# Altium PCB PCB1.PcbDoc
Units mil, origin at the board's own origin, x right, y up, seen from the top; angles counter-clockwise.
Board outline 2000 x 2000 mil, 2 copper layers (Top Layer, Bottom Layer); 59 components, 41 nets, 235 pads, 101 vias.
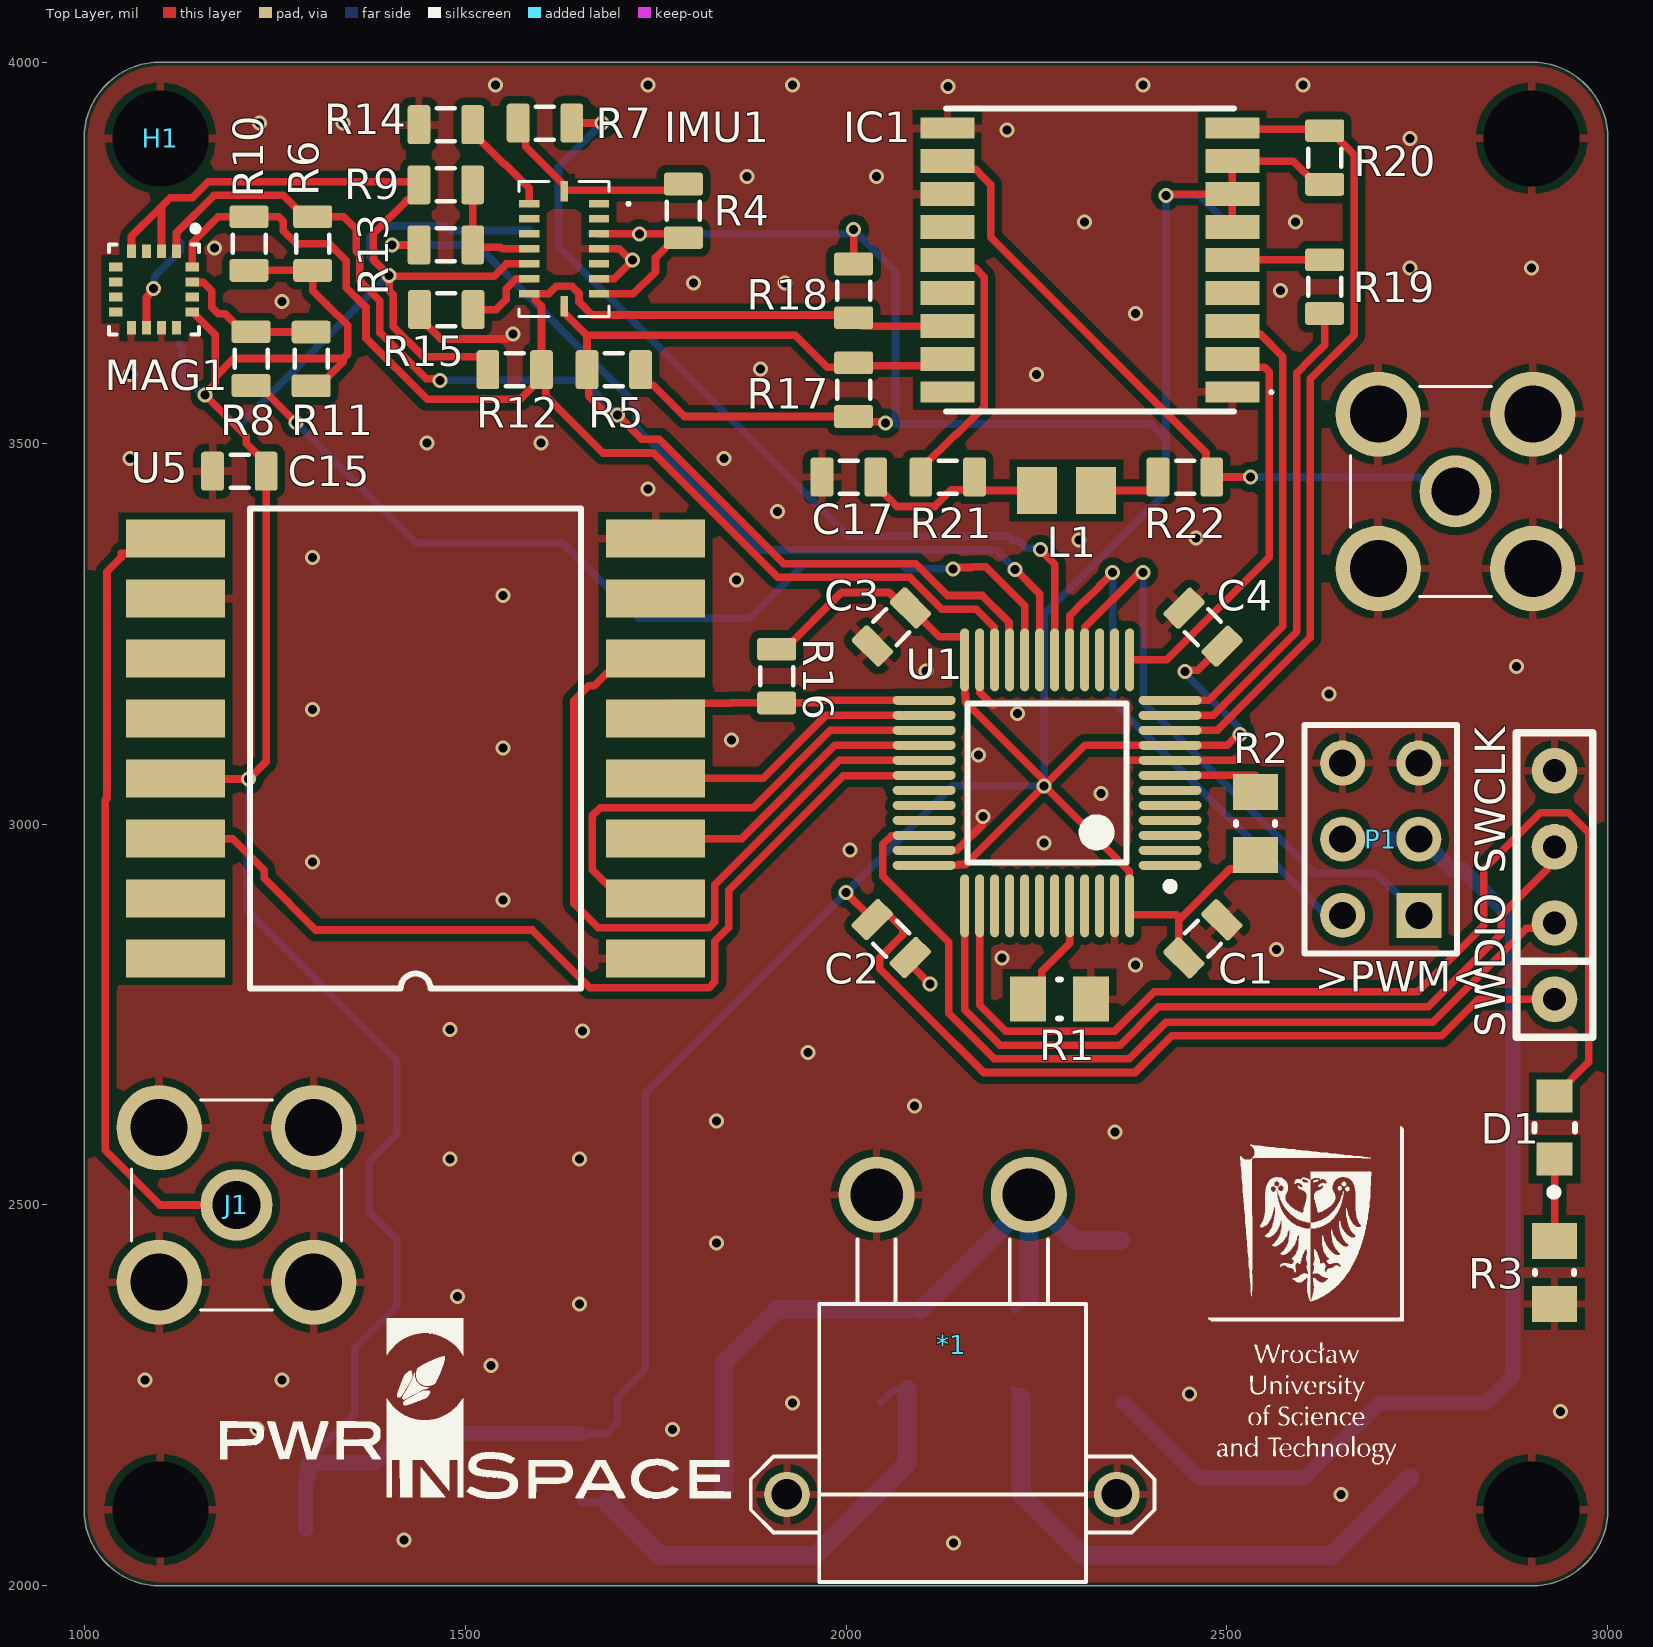
[diagram p0: Top Layer view]
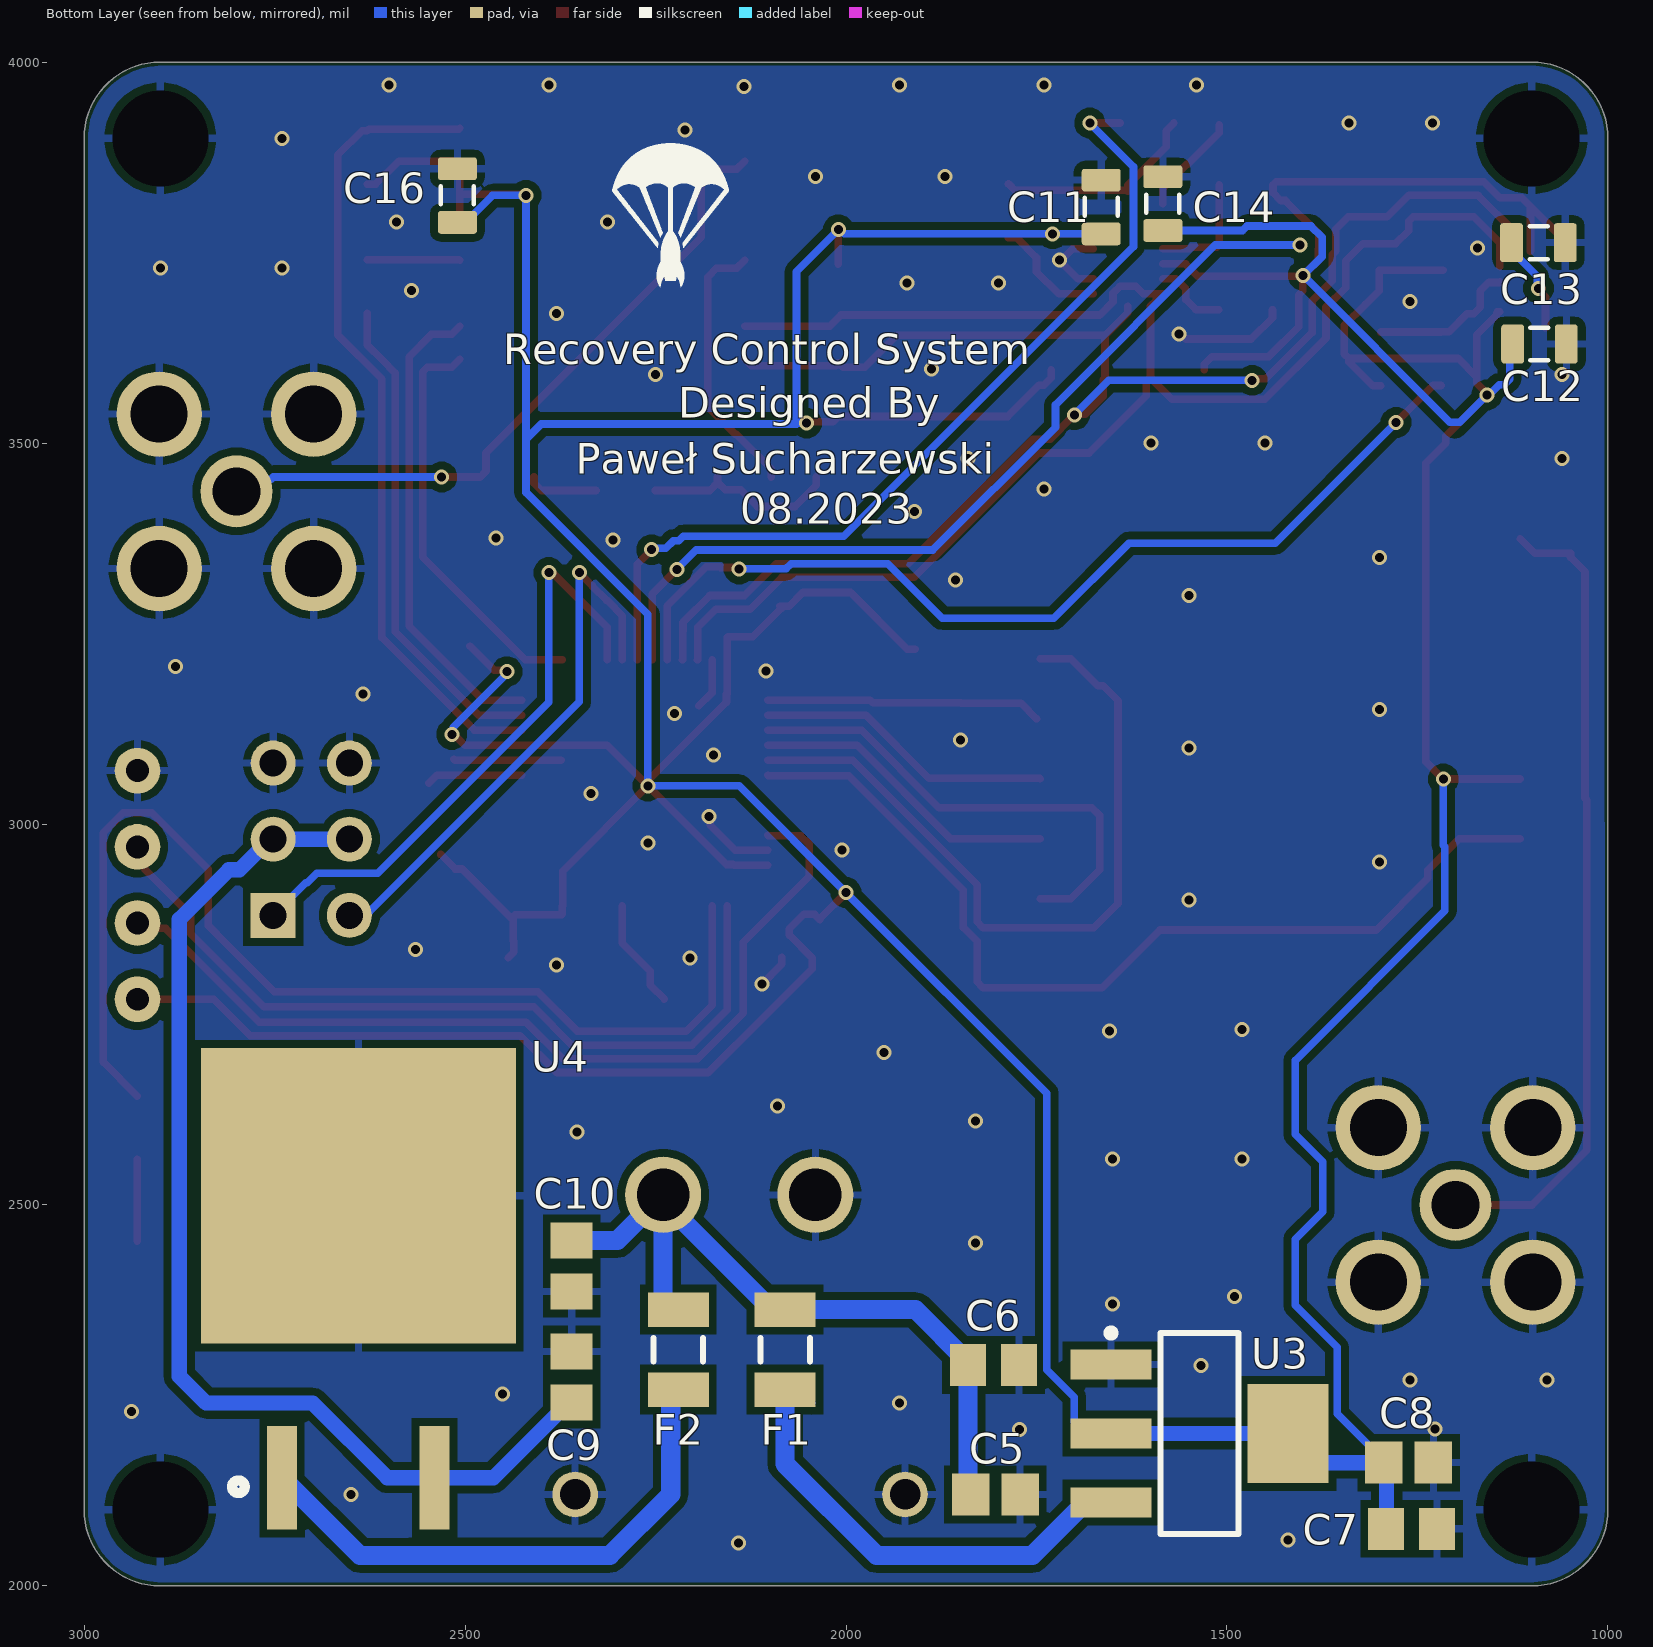
[diagram p1: Bottom Layer view, seen from below]
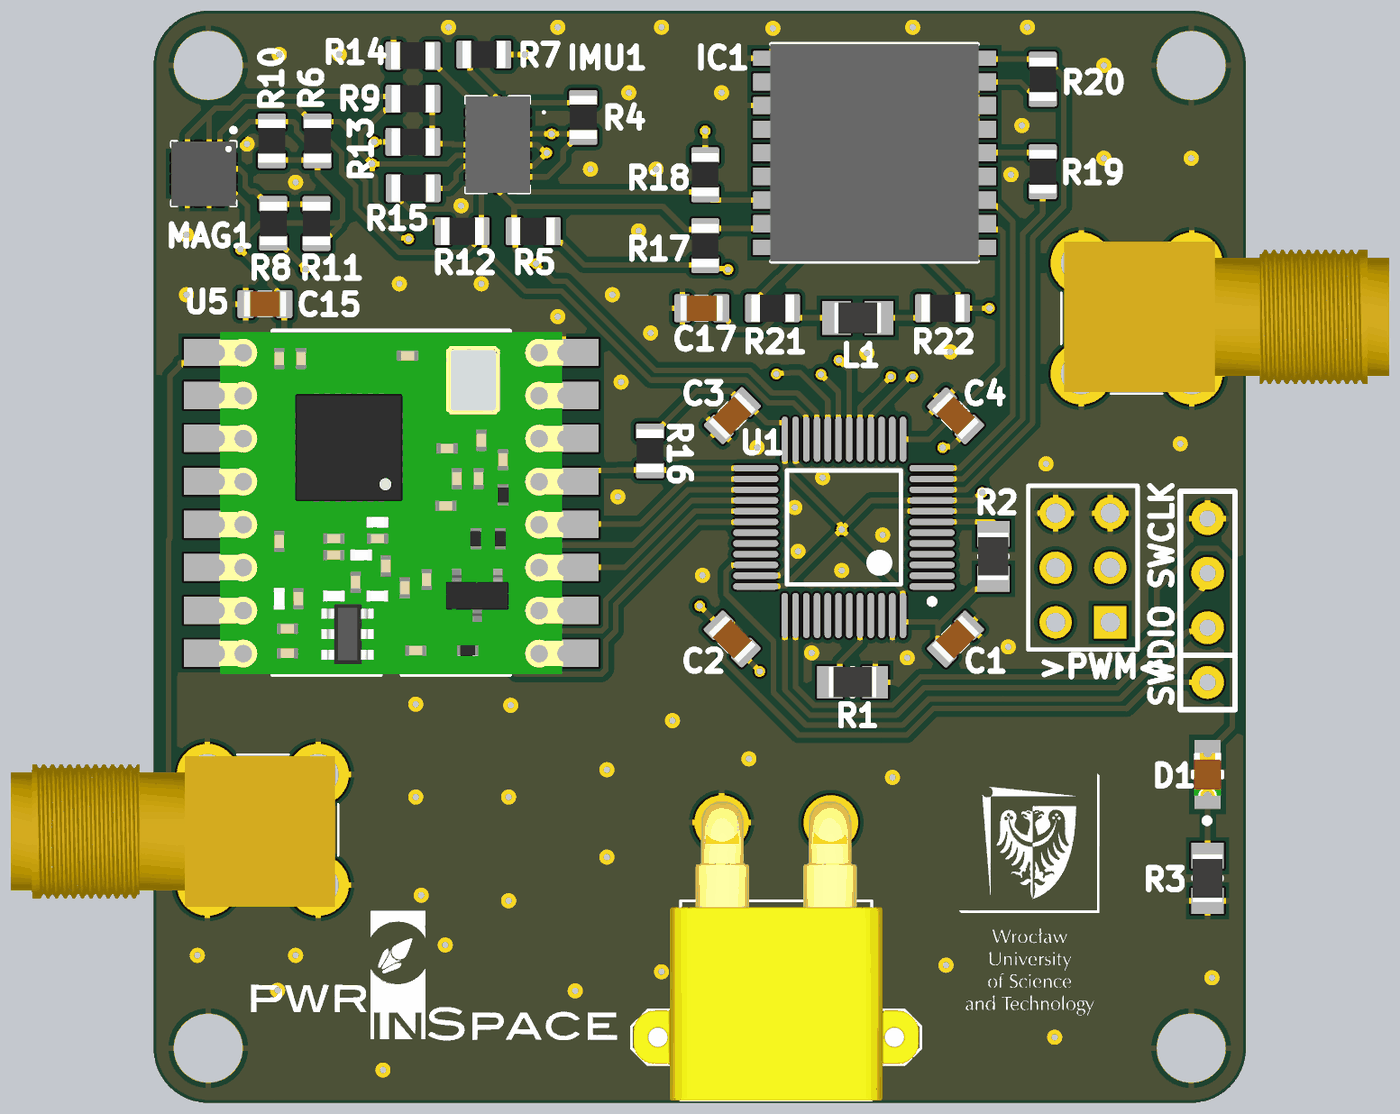
[diagram p2: 3D render of the assembled board from above, using the file's embedded part models]
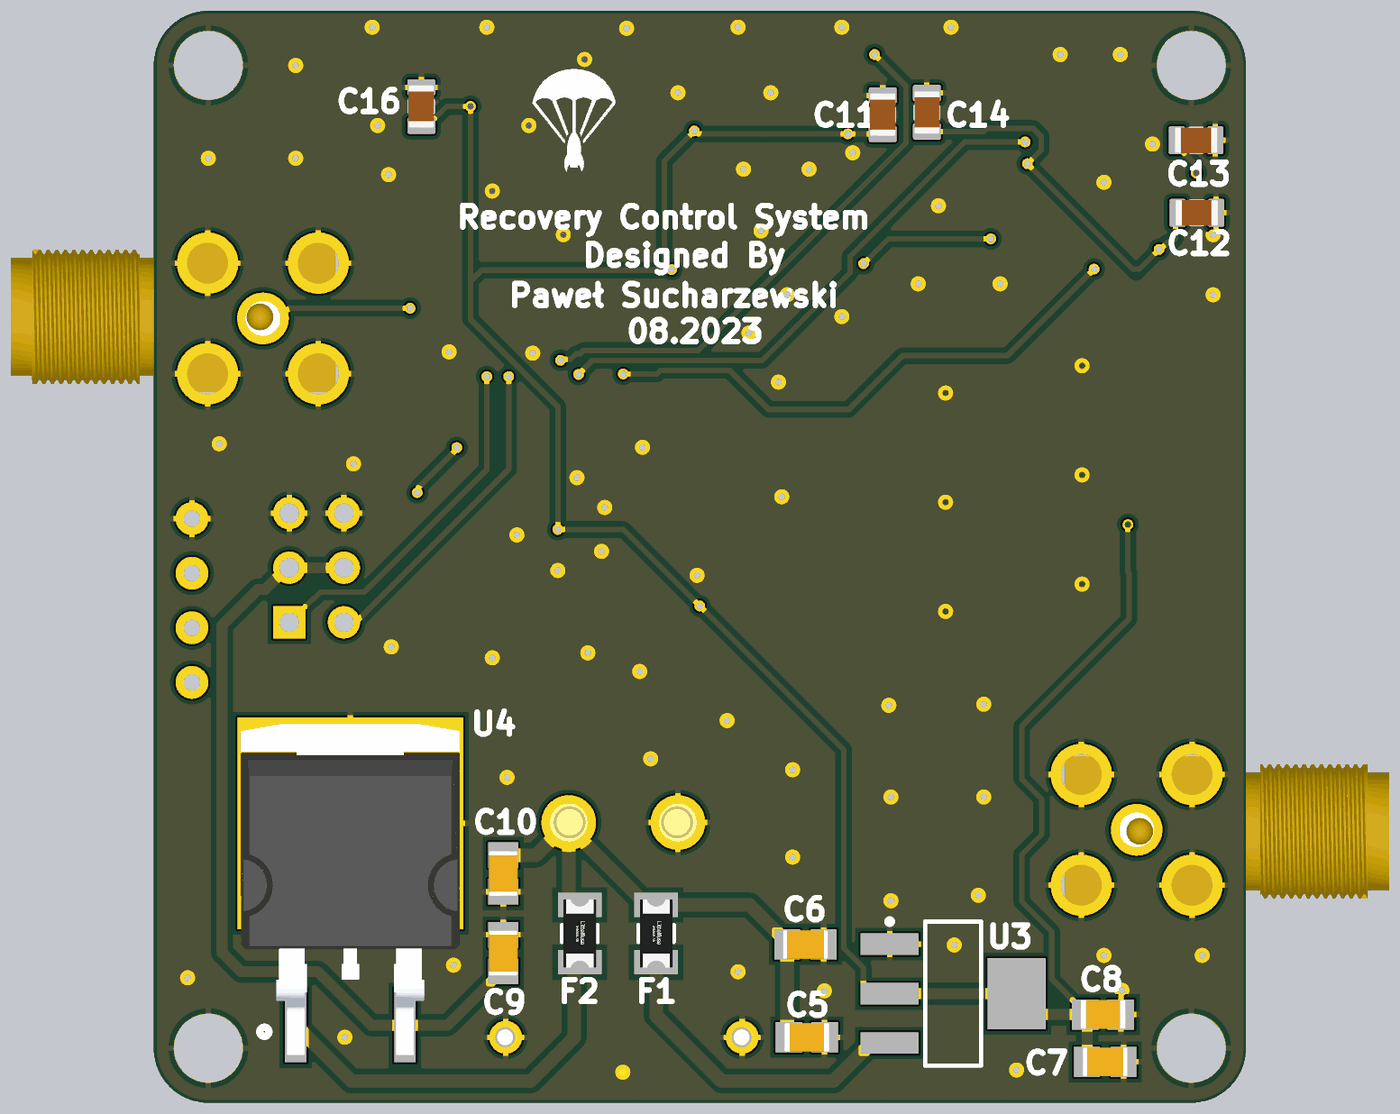
[diagram p3: 3D render of the assembled board from below, using the file's embedded part models]

## Layer stack, top to bottom
Top Solder: solder mask 0.4, Solder Resist, Dk 3.5
Top Layer: signal copper 1.4
Dielectric 1: dielectric 12.6, FR-4, Dk 4.8
Bottom Layer: signal copper 1.4
Bottom Solder: solder mask 0.4, Solder Resist, Dk 3.5

## Board outline
1000,2100 1000,3900 cw(c1100,3900) 1100,4000 2900,4000 cw(c2900,3900) 3000,3900 3000,3800 3000,2200 3000,2100 cw(c2900,2100) 2900,2000 2800,2000 1100,2000 cw(c1100,2100)

## Design rules (kind name [scope] priority, off if disabled: settings)
Clearance [All] p1: gap=10 ignorepadtopadclearanceinfootprint=FALSE except(0: Arc-Hole Track-Hole SMDPad-Hole THPad-Hole Via-Hole Fill-Hole Poly-Hole Region-Hole Text-Hole; 5: SMDPad-SMDPad; 8: Arc-Arc Arc-Track Arc-SMDPad Track-Track Track-SMDPad)
HoleSize [All] p1: absolutevalues=TRUE maxlimit=200 minlimit=1 maxpercent=80.000 minpercent=20.000
MinimumSolderMaskSliver [All] p1: minsoldermaskwidth=1
PolygonConnect [All] p1: thpad.connectstyle=Relief thpad.reliefconductorwidth=10 thpad.reliefentries=4 thpad.polygonreliefangle="90 Angle" thpad.airgapwidth=10 smdpad.connectstyle=Relief smdpad.reliefconductorwidth=10 smdpad.reliefentries=4 smdpad.polygonreliefangle="90 Angle" smdpad.airgapwidth=10 via.connectstyle=Direct via.reliefconductorwidth=10 via.reliefentries=4 via.polygonreliefangle="90 Angle" via.airgapwidth=10
RoutingVias [All] p1: holewidth=11.81 width=19.68 viastyle="Through Hole" minholewidth=11.81 minwidth=19.68 maxholewidth=28 maxwidth=50
SilkToSilkClearance [All] p1: silktosilkclearance=1
SilkToSolderMaskClearance [IsPad] p1: minsilkscreentomaskgap=1 clearancetoexposedcopper=TRUE
SolderMaskExpansion [All] p1: expansion=4 istentingtop=FALSE
Width [All] p1: maxlimit=30 minlimit=10 preferedwidth=10 minimp=50.000000 maximp=50.000000 favimp=50.000000
26 further rules are at their usual default settings.

## Classes and differential pairs
component class STM32: C1 C2 C3 C4 D1 R1 R2 R3 U1
component class Sensors: C11 C12 C13 C14 IMU1 MAG1 R4 R5 R6 R7 R8 R9 R10 R11 R12 R13 R14 R15
component class Power: C5 C6 C7 C8 C9 C10 F1 F2 U3 U4
component class LoRa: C15 R16 U5
component class GPS: C16 C17 IC1 L1 R17 R18 R19 R20 R21 R22

## Components (designator, comment, footprint, x,y, rotation, side; value= is the part's Value field where it differs from the comment)
*1 "XT30PW-M" XT30PW-M-Footprint-1 2140,2120 r180 top
C1 "Capacitor 100µF +/-20% 6.3V 0805" CAPC0805(2012)145_L 2468.5,2849.5 r45 top value=100nF
C2 "Capacitor 100µF +/-20% 6.3V 0805" CAPC0805(2012)145_L 2059.5,2849.5 r315 top value=100nF
C3 "Capacitor 100µF +/-20% 6.3V 0805" CAPC0805(2012)145_L 2059.5,3258.5 r225 top value=100nF
C4 "Capacitor 100µF +/-20% 6.3V 0805" CAPC0805(2012)145_L 2468.5,3258.5 r135 top value=100nF
C5 "Capacitor 100 nF +/-10% 50 V 0805" CAPC2013X95X50NL10T25 1804.03,2120 r180 bottom value=100nF
C6 "Capacitor 10 uF +/- 10% 16 V 0805" CAPC2013X135X45NL10T25 1806.54,2290 r180 bottom value=10µF
C7 "Capacitor 10 uF +/- 10% 16 V 0805" CAPC2013X135X45NL10T25 1257.54,2075 r180 bottom value=10µF
C8 "Capacitor 100 nF +/-10% 50 V 0805" CAPC2013X95X50NL10T25 1261.48,2161.78 r180 bottom value=100nF
C9 "Capacitor 10 uF +/- 10% 16 V 0805" CAPC2013X135X45NL10T25 2360,2274.16 r90 bottom value=100nF
C10 "Capacitor 10 uF +/- 10% 16 V 0805" CAPC2013X135X45NL10T25 2360,2420 r270 bottom value=330nF
C11 "Capacitor 100µF +/-20% 6.3V 0805" CAPC0805(2012)145_L 1665,3810 r90 bottom value=100nF
C12 "Capacitor 100µF +/-20% 6.3V 0805" CAPC0805(2012)145_L 1090,3630 r0 bottom value=1uF
C13 "Capacitor 100µF +/-20% 6.3V 0805" CAPC0805(2012)145_L 1091.04,3763 r180 bottom value=10uF
C14 "Capacitor 100µF +/-20% 6.3V 0805" CAPC0805(2012)145_L 1584.13,3814.06 r270 bottom value=100nF
C15 "Capacitor 100µF +/-20% 6.3V 0805" CAPC0805(2012)145_L 1204,3463 r0 top value=100nF
C16 "Capacitor 100µF +/-20% 6.3V 0805" CAPC0805(2012)145_L 2510,3825 r90 bottom value=100nF
C17 "Capacitor 100µF +/-20% 6.3V 0805" CAPC0805(2012)145_L 2003.51,3455.38 r180 top value=10nF
D1 "150080SS75000" FP-150080SS75000-MFG 2930,2601.34 r90 top
F1 "1A" FP-0466-MFG 2080,2310 r270 bottom value=0.075Ω
F2 "2A" FP-0466-MFG 2220,2310 r270 bottom value=0.075Ω
H1 "Mounting Hole M3" Mounting_Hole_m3#1 1100,3900 r0 top
H2 "Mounting Hole M3" Mounting_Hole_m3#2 2900,3900 r0 top
H3 "Mounting Hole M3" Mounting_Hole_m3#1 1100,2100 r0 top
H4 "Mounting Hole M3" Mounting_Hole_m3#1 2900,2100 r0 top
IC1 "MAX-M10S-00B" MAXM10S00B 2320,3740 r0 top
IMU1 "BMI088" BMI088 1630,3755 r270 top
J1 "PCB.SMAFRA.HT" PCBSMAFRAHT 1200,2500 r90 top
J2 "PCB.SMAFRA.HT" PCBSMAFRAHT 2800,3436.56 r270 top
L1 "27nH" INDC2013X105X50ML20T20 2289.28,3437.67 r0 top
MAG1 "MMC5983MA" PQFN50P300X300X100-16N 1091.75,3701.7 r270 top
P1 "Header 3X2A" HDR2X3_CEN 2751.78,2880 r90 top
R1 "Resistor 10k +/-1% 0805 125 mW" RESC2013X50X35ML15T15 2280,2770.37 r180 top value=100k
R2 "Resistor 10k +/-1% 0805 125 mW" RESC2013X50X35ML15T15 2537.63,3000.95 r90 top value=100k
R3 "Resistor 10k +/-1% 0805 125 mW" RESC2013X50X35ML15T15 2930,2411.21 r90 top value=270R
R4 "Resistor 4R7  +/-5 % 0805 125 mW" RESC0805(2012)_L 1786.66,3804.96 r90 top value=10k
R5 "Resistor 4R7  +/-5 % 0805 125 mW" RESC0805(2012)_L 1695.04,3596.29 r180 top value=4K7
R6 "Resistor 4R7  +/-5 % 0805 125 mW" RESC0805(2012)_L 1300.09,3761.63 r270 top value=2K7
R7 "Resistor 4R7  +/-5 % 0805 125 mW" RESC0805(2012)_L 1604.66,3920 r180 top value=0
R8 "Resistor 4R7  +/-5 % 0805 125 mW" RESC0805(2012)_L 1219.09,3610.54 r270 top value=0
R9 "Resistor 4R7  +/-5 % 0805 125 mW" RESC0805(2012)_L 1474.96,3838.91 r0 top value=10k
R10 "Resistor 4R7  +/-5 % 0805 125 mW" RESC0805(2012)_L 1216.48,3761.63 r270 top value=2K7
R11 "Resistor 4R7  +/-5 % 0805 125 mW" RESC0805(2012)_L 1298.09,3610.54 r90 top value=10k
R12 "Resistor 4R7  +/-5 % 0805 125 mW" RESC0805(2012)_L 1564.95,3596.29 r180 top value=4K7
R13 "Resistor 4R7  +/-5 % 0805 125 mW" RESC0805(2012)_L 1474.96,3760 r0 top value=0
R14 "Resistor 4R7  +/-5 % 0805 125 mW" RESC0805(2012)_L 1474.57,3917.82 r180 top value=10K
R15 "Resistor 4R7  +/-5 % 0805 125 mW" RESC0805(2012)_L 1475.19,3675.2 r180 top value=10K
R16 "Resistor 4R7  +/-5 % 0805 125 mW" RESC0805(2012)_L 1909,3194 r270 top value=10K
R17 "Resistor 4R7  +/-5 % 0805 125 mW" RESC0805(2012)_L 2010,3569.91 r270 top value=4K7
R18 "Resistor 4R7  +/-5 % 0805 125 mW" RESC0805(2012)_L 2010,3700 r90 top value=4K7
R19 "Resistor 4R7  +/-5 % 0805 125 mW" RESC0805(2012)_L 2628.24,3705.43 r90 top value=0
R20 "Resistor 4R7  +/-5 % 0805 125 mW" RESC0805(2012)_L 2628.24,3874.57 r270 top value=10K
R21 "Resistor 4R7  +/-5 % 0805 125 mW" RESC0805(2012)_L 2133.6,3455.38 r0 top value=10
R22 "Resistor 4R7  +/-5 % 0805 125 mW" RESC0805(2012)_L 2444.96,3455.38 r0 top value=0
U1 "STM32F103C8T6" STM-LQFP48_M 2264,3054 r180 top
U2 "ST-Link_4_pin" ST-Link_4_pin-Footprint-1 2930,2770 r180 top
U3 "LM1117IMPX-3.3" MP04A_M 1536.14,2200 r180 bottom
U4 "L7805ACD2T-TR" TO254P1515X470-3N 2640,2390 r90 bottom
U5 "LORA RFM95W" "LORA RFM95W - duplicate1" 1750,2823.3 r180 top

## Footprints (in the part's own frame and the unit in brackets; to place one, negate y for a bottom-side part, rotate by r counter-clockwise, add the part's x,y. Pads: shape width x height; smd on the part's side, far side on the other; paste and mask are expansions set on the pad)
BMI088 [mm]
  rect 0.25x0.675 smd: 1(-1.5,1.165) 2(-1,1.165) 3(-0.5,1.165) 4(0,1.165) 5(0.5,1.165) 6(1,1.165) 7(1.5,1.165) 9(1.5,-1.165) 10(1,-1.165) 11(0.5,-1.165) 12(0,-1.165) 13(-0.5,-1.165) 14(-1,-1.165) 15(-1.5,-1.165)
  rect 0.675x0.25 smd: 8(1.915,0) 16(-1.915,0)
  silkscreen extent -2.25,-1.5 2.25,2.2, body extent -2.25,-1.5 2.25,1.5, height 1.55
CAPC0805(2012)145_L [mm] "Chip Capacitor, Body 2.0x1.2mm, Height 1.45mm, IPC High Density"
  rrect25% 0.76x1.3 smd: 1(-0.9,0) 2(0.89,0)
  silkscreen extent -0.3,-0.55 0.3,0.55, body extent -1,-0.6 1,0.6, height 1.45
CAPC2013X95X50NL10T25 [mm] "Chip Capacitor, 2-Leads, Body 2.10x1.35mm, IPC Medium Density"
  rect 1.25x1.4 smd: 1(-0.825,0) 2(0.825,0)
  body extent -1.05,-0.67 1.05,0.67, height 0.95
CAPC2013X135X45NL10T25 [mm] "Chip Capacitor, 2-Leads, Body 2.10x1.35mm, IPC Medium Density"
  rect 1.2x1.4 smd: 1(-0.85,0) 2(0.85,0)
  body extent -1.05,-0.67 1.05,0.67, height 1.35
FP-0466-MFG [mil]
  rect 45x80 smd paste+0 mask+0: 1(-52.5,0) 2(52.5,0)
  silkscreen extent -15,-32 15,32, body extent -63,-30 63,30, height 23
FP-150080SS75000-MFG [mm]
  rect 1.1x1.2 smd paste+0 mask+0: 1(-1.05,0) 2(1.05,0)
  silkscreen extent -2.27,-0.67 0.13,0.67, body extent -1.7,-0.77 1.7,0.77, height 0.25
HDR2X3_CEN [mm] "Connector; Header; 3x2 Position"
  rect 1.5x1.5 hole 0.9: 1(0,0)
  round 1.5 hole 0.9: 2(2.54,0) 3(5.08,0) 4(0,2.54) 5(2.54,2.54) 6(5.08,2.54)
  silkscreen extent -1.27,-1.27 6.35,3.81
INDC2013X105X50ML20T20 [mm] "Chip Inductor, 2-Leads, Body 2.2x1.45mm, IPC Low Density"
  rect 1.33x1.57 smd: 1(-0.985,0) 2(0.985,0)
  body extent -1.1,-0.72 1.1,0.72, height 1.05
"LORA RFM95W - duplicate1" [mm]
  rect 3.3x1.27 smd: 1(0,0) 2(0,-2) 3(0,-4) 4(0,-6) 5(0,-8) 6(0,-10) 7(0,-12) 8(0,-14) 9(16,-14) 10(16,-12) 11(16,-10) 12(16,-8) 13(16,-6) 14(16,-4) 15(16,-2) 16(16,0)
  silkscreen extent 2.48,-15 13.52,1, body extent 0,-14.94 16,0.96, height 2.21
MAXM10S00B [mm]
  rect 1.8x0.7 smd: 1(4.75,-4.4) 9(4.75,4.4) 10(-4.75,4.4) 18(-4.75,-4.4)
  rect 1.8x0.8 smd: 2(4.75,-3.3) 3(4.75,-2.2) 4(4.75,-1.1) 5(4.75,0) 6(4.75,1.1) 7(4.75,2.2) 8(4.75,3.3) 11(-4.75,3.3) 12(-4.75,2.2) 13(-4.75,1.1) 14(-4.75,0) 15(-4.75,-1.1) 16(-4.75,-2.2) 17(-4.75,-3.3)
  silkscreen extent -4.8,-5.05 6.1,5.05, body extent -4.85,-5.05 4.85,5.05, height 2.8
Mounting_Hole_m3#1 [mm]
  round 1 hole 3.2: 1(0,0)
Mounting_Hole_m3#2 [mm]
  round 1 hole 3.2 paste-2539.97 mask+0.102: 1(0,0)
MP04A_M [mm] "SOT223, 4-Leads, Body 6.5x3.5mm, Pitch 2.3mm, Lead Span 7mm, IPC Low Density"
  rect 2.7x1 smd: 1(-2.95,2.3) 2(-2.95,0) 3(-2.95,-2.3)
  rect 2.7x3.3 smd: 4(2.95,0)
  silkscreen extent -3.08,-3.35 1.3,3.47, body extent -1.86,-3.35 1.86,3.35, height 1.8
PCBSMAFRAHT [mm]
  round 2.4 hole 1.6: 1(0,0)
  round 2.85 hole 1.9: 2(-2.575,2.575) 3(-2.575,-2.575) 4(2.575,-2.575) 5(2.575,2.575)
  silkscreen extent -3.5,-3.5 3.5,3.5, body extent -3.57,-3.36 3.43,11.74, height 9.09
PQFN50P300X300X100-16N [mm]
  rect 0.45x0.3 smd: 1(-1.275,0.75) 2(-1.275,0.25) 3(-1.275,-0.25) 4(-1.275,-0.75) 9(1.275,-0.75) 10(1.275,-0.25) 11(1.275,0.25) 12(1.275,0.75)
  rect 0.3x0.45 smd: 5(-0.75,-1.275) 6(-0.25,-1.275) 7(0.25,-1.275) 8(0.75,-1.275) 13(0.75,1.275) 14(0.25,1.275) 15(-0.25,1.275) 16(-0.75,1.275)
  silkscreen extent -2.13,-1.5 1.5,1.5, body extent -1.5,-1.5 1.5,1.5, height 1
RESC0805(2012)_L [mm] "Chip Resistor, Body 2.0x1.3mm, IPC High Density"
  rrect25% 0.76x1.3 smd: 1(-0.9,0) 2(0.89,0)
  silkscreen extent -0.3,-0.55 0.3,0.55, body extent -1,-0.62 1,0.63, height 0.6
RESC2013X50X35ML15T15 [mm] "Chip Resistor, 2-Leads, Body 2.2x1.4mm, IPC Low Density"
  rect 1.2x1.5 smd: 1(-1.05,0) 2(1.05,0)
  silkscreen extent -0.05,-0.65 0.05,0.65, body extent -1.1,-0.7 1.1,0.7, height 0.5
ST-Link_4_pin-Footprint-1 [mil]
  round 60 hole 30: 1(0,0) 2(0,-100) 3(0,-200) 4(0,-300)
  silkscreen extent -50,-350 50,50
STM-LQFP48_M [mm] "QFP, 48-Leads, Body 7x7mm, Pitch 0.5mm, IPC Low Density"
  oval 2.1x0.3 smd: 1(-4.1,2.75) 2(-4.1,2.25) 3(-4.1,1.75) 4(-4.1,1.25) 5(-4.1,0.75) 6(-4.1,0.25) 7(-4.1,-0.25) 8(-4.1,-0.75) 9(-4.1,-1.25) 10(-4.1,-1.75) 11(-4.1,-2.25) 12(-4.1,-2.75) 25(4.1,-2.75) 26(4.1,-2.25) 27(4.1,-1.75) 28(4.1,-1.25) 29(4.1,-0.75) 30(4.1,-0.25) 31(4.1,0.25) 32(4.1,0.75) 33(4.1,1.25) 34(4.1,1.75) 35(4.1,2.25) 36(4.1,2.75)
  oval 0.3x2.1 smd: 13(-2.75,-4.1) 14(-2.25,-4.1) 15(-1.75,-4.1) 16(-1.25,-4.1) 17(-0.75,-4.1) 18(-0.25,-4.1) 19(0.25,-4.1) 20(0.75,-4.1) 21(1.25,-4.1) 22(1.75,-4.1) 23(2.25,-4.1) 24(2.75,-4.1) 37(2.75,4.1) 38(2.25,4.1) 39(1.75,4.1) 40(1.25,4.1) 41(0.75,4.1) 42(0.25,4.1) 43(-0.25,4.1) 44(-0.75,4.1) 45(-1.25,4.1) 46(-1.75,4.1) 47(-2.25,4.1) 48(-2.75,4.1)
  silkscreen extent -4.23,-2.65 2.65,3.57, body extent -3.5,-3.5 3.5,3.5, height 1.6
TO254P1515X470-3N [mm]
  rect 3.45x1 smd: 1(-6.3,2.54) 2(-6.3,-2.54)
  rect 9.85x10.5 smd paste-6: 3(3.1,0)
  silkscreen extent -6.88,3.72 -6.32,4.28, body extent -7.71,-5.1 7.71,5.1, height 4.6
XT30PW-M-Footprint-1 [mil]
  round 100 hole 69: 1(99.88,-393.27) 2(-100.04,-393.27)
  round 60 hole 40: 3(-215.48,0) 4(217.47,0)
  silkscreen extent -265,-335 265,115, body extent -262,-433 262,116, height 197

## Part data
*1: library part CMP-002-00073-3, "XT30PW-M公头 Socket,DCsupply,XT30,male,PIN:2"
C1 C2 C3 C4 C11 C12 C13 C14 C15 C16 C17: library part CMP-001-00054-4, "Chip Capacitor, 100µF +/-20%, 6.3V, 0805, Thickness 1.45 mm", Case/Package=0805, Max Operating Temperature=85°C, Min Operating Temperature=-55°C, Tolerance=10%, Voltage Rating=6.3V, Mounting Technology=SMT, Pins=2
C5 C8: library part CMP-001-00018-6, "Chip Capacitor, 100 nF, +/- 10%, 50 V, 0805 (2012 Metric)", Capacitor Type=Ceramic, Case/Package=0805, Max Operating Temperature=125°C, Min Operating Temperature=-55°C, Tolerance=10%, Voltage Rating=50V, Mounting Technology=SM, Pins=2, RoHS Compliant=True
C6 C7 C9 C10: library part CMP-001-00015-6, "Chip Capacitor, 10 uF, +/- 10%, 16 V, 0805 (2012 Metric)", Capacitor Type=Ceramic, Case/Package=0805, Max Operating Temperature=85°C, Min Operating Temperature=-55°C, Tolerance=10%, Voltage Rating=16V, Mounting Technology=SM, Pins=2, RoHS Compliant=True
D1: library part CMP-004-00035-1, "Red 630nm LED Indication - Discrete 1.9V 0805 (2012 Metric)"
F1: library part CMP-08605-000058-1, "FUSE BOARD MNT 1A 63VAC/VDC 1206", Fuse Interrupt Ac Current=50A, Fuse Voltage Drop=79.97mV, Manufacturer="Littelfuse Inc", Manufacturer Part Number=0466001.NR, Max Fuse Ac Voltage=63V, Package=0466, Resistance=0.075Ω, Temperature="-55°C to +90°C", Temperature Range High=+90°C, Temperature Range Low=-55°C, Automotive=No, Category=Fuse, ComponentLink2Description=Datasheet, ComponentLink2URL=https://www.littelfuse.com/~/media/electronics/datasheets/fuses/littelfuse_fuse_466_datasheet.pdf.pdf, Device Class L1="Circuit Protection", Device Class L2=Fuses, Device Class L3=unset, Digikey Description="FUSE BOARD MNT 1A 63VAC/VDC 1206", Fuse Blow Speed=Fast, Fuse Current=1A, Fuse I2T=0.0423A2Sec, Fuse Interrupt Dc Current=50A, Height=0.66mm, Lead Free=Yes, Max Fuse Dc Voltage=63V, Mouser Description="Surface Mount Fuses 63V FA 1206 1A VFA Slimline", Octopart=https://octopart.com/0466001.nr-littelfuse-566005, RoHS=TRUE, Voltage Rating=63V
F2: library part CMP-08605-000058-1, "FUSE BOARD MNT 1A 63VAC/VDC 1206", Fuse Current=1A, Fuse Interrupt Ac Current=50A, Fuse Voltage Drop=79.97mV, Manufacturer="Littelfuse Inc", Manufacturer Part Number=0466001.NR, Max Fuse Ac Voltage=63V, Package=0466, Resistance=0.075Ω, Temperature="-55°C to +90°C", Temperature Range High=+90°C, Temperature Range Low=-55°C, Automotive=No, Category=Fuse, ComponentLink2Description=Datasheet, ComponentLink2URL=https://www.littelfuse.com/~/media/electronics/datasheets/fuses/littelfuse_fuse_466_datasheet.pdf.pdf, Device Class L1="Circuit Protection", Device Class L2=Fuses, Device Class L3=unset, Digikey Description="FUSE BOARD MNT 1A 63VAC/VDC 1206", Fuse Blow Speed=Fast, Fuse I2T=0.0423A2Sec, Fuse Interrupt Dc Current=50A, Height=0.66mm, Lead Free=Yes, Max Fuse Dc Voltage=63V, Mouser Description="Surface Mount Fuses 63V FA 1206 1A VFA Slimline", Octopart=https://octopart.com/0466001.nr-littelfuse-566005, RoHS=TRUE, Voltage Rating=63V
H1 H2 H3 H4: library part CMP-006-000018-1, "M3", Design Item ID="Mounting Hole M3", Source=SamacSys.SchLib
IC1: library part CMP-003-000008-1, "Integrated Circuit", Manufacturer_Name=U-Blox, Mouser Part Number=377-MAX-M10S-00B, Datasheet Link=https://content.u-blox.com/sites/default/files/MAX-M10S_IntegrationManual_UBX-20053088.pdf, Design Item ID=MAX-M10S-00B, Height=2.7mm, Manufacturer_Part_Number=MAX-M10S-00B, Mouser Price/Stock=https://www.mouser.co.uk/ProductDetail/u-blox/MAX-M10S-00B?qs=A6eO%252BMLsxmT0PfQYPb7LLQ%3D%3D, Source=SamacSys.SchLib
IMU1: library part CMP-003-000006-1, "Integrated Circuit", Manufacturer_Name="Bosch Sensortec", Mouser Part Number=262-BMI088, Arrow Part Number=BMI088, Arrow Price/Stock=https://www.arrow.com/en/products/bmi088/bosch?region=europe, Datasheet Link=https://datasheet.datasheetarchive.com/originals/distributors/Datasheets_SAMA/994c3bf88e91a9e9fead6a819d348e4d.pdf, Design Item ID=BMI088, Height=1.45mm, Manufacturer_Part_Number=BMI088, Mouser Price/Stock=https://www.mouser.co.uk/ProductDetail/Bosch-Sensortec/BMI088?qs=f9yNj16SXrIMFspTV6RB6Q%3D%3D, Source=SamacSys.SchLib
J1 J2: library part CMP-002-000386-1, "Connector", Manufacturer_Name=Taoglas, Mouser Part Number=960-PCB.SMAFRA.HT, Datasheet Link=https://www.mouser.com/datasheet/2/398/PCB.SMAFRA.HT_-1220750.pdf, Design Item ID=PCB.SMAFRA.HT, Height=9mm, Manufacturer_Part_Number=PCB.SMAFRA.HT, Mouser Price/Stock=https://www.mouser.co.uk/ProductDetail/Taoglas/PCB.SMAFRA.HT?qs=RuW%2Fu%252BNMQmubIFYcN8w5Dw%3D%3D, Source=SamacSys.SchLib
L1: library part CMP-006-00000-3, "IND, Chip Ferrite Bead, 330 Ohm, +/- 25%, 1.5 A, -55 to 125 degC, 0805 (2012 Metric), Tape and Reel", Case/Package=0805, Current Rating=1.5A, Manufacturer=Murata, Max Operating Temperature=125°C, Min Operating Temperature=-55°C, Package Description="2-Pin Surface Mount Device, Body 2 x1.25 mm", Package Quantity=4000, Resistance=90mohm, Tolerance=25%, Core Material=Ferrite, Datasheet URL=http://psearch.en.murata.com/inductor/product/LQG15HS15NJ02_.pdf, Datasheet Version=Nov-11, Impedance=330Ohm, Max Current Rating=1.5A, Mounting Technology=SM, Package Reference=0805, Packaging=TapeandReel, RoHS Compliant=True
MAG1: library part CMP-004-000030-1, "MMC5983 series Magnetic, Magnetometer Sensor Evaluation Board", Package=None, Availability=Unavailable, Component Type=Standard, Design Item ID=MMC5983MA, MF="{'manufacturer': u'Memsic Inc.'}", MP=MMC5983MA, Pin Count=16, Price=None, Source=MMC5983MA.SchLib
P1: library part CMP-005-000095-1, "Header, 3-Pin, Dual row", Component Type=Standard, Design Item ID="Header 3X2A", LatestRevisionDate=17-Jul-2002, LatestRevisionNote="Re-released for DXP Platform.", Pin Count=6, Publisher="Altium Limited", Source="Miscellaneous Connectors.SchLib"
R1 R2 R3: library part CMP-009-00018-5, "Chip Resistor, 10 KOhm, +/- 1%, 125 mW, -55 to 155 degC, 0805 (2012 Metric)", Case/Package=0805, Max Operating Temperature=155°C, Min Operating Temperature=-55°C, Power=125mW, Tolerance=1%, Voltage Rating=150V, Mounting Technology=SM, Pins=2, RoHS Compliant=True
R4 R5 R6 R7 R8 R9 R10 R11 R12 R13 R14 R15 R16 R17 R18 R19 R20 R21 R22: library part CMP-009-00174-3, "Chip Resistor, 4,7 Ohms, +/-5 %, 125 mW, -55 to 155 degC, 0805", Case/Package=0805, Max Operating Temperature=155°C, Min Operating Temperature=-55°C, Power=125mW, Tolerance=5%, Pins=2
U1: library part CMP-020-00023-1, "IC MCU 32BIT 64KB FLASH 48LQFP"
U2: library part CMP-002-00081-1, "ST-Link 4 pin DEBUG (3V3, SWDIO, SWCLK, GND)"
U3: library part CMP-0062-01630-3, "800mA Low-Dropout Linear Regulator, 4-pin SOT-223", Manufacturer="National Semiconductor", PackageTopMarking=XYTT*N05B, PowerWise=N, Code_IPC=SOT223-4, Code_JEDEC=TO-261-AA, ComponentLink1Description="Manufacturer URL", ComponentLink1URL=http://www.national.com/, ComponentLink2Description="LM1117 Datasheet", ComponentLink2URL=http://www.national.com/ds/LM/LM1117.pdf, ComponentLink3Description="LM1117 Web Page", ComponentLink3URL=http://www.national.com/pf/LM/LM1117.html, ComponentLink4Description="MP04A Package Page", ComponentLink4URL=http://www.national.com/packaging/folders/mp04a.html, CompType="LDO IC", DatasheetVersion=Apr-2006, High-Reliability=Y, PackageDescription="Molded SOT-223, 6.50 x 3.56 x 1.6mm Body, 4 Lead, 2.3mm Pitch", PackageReference=MP04A, PackageVersion="revB, Apr-2003", PartNumber=LM1117IMPX-3.3, PinCount=4, RevisionNote="SCH symbol layout adjusted", RoHS=N
U4: "Positive voltage regulator ICs", Package=None, Availability=Unavailable, MF="{'manufacturer': u'STMicroelectronics'}", MP=L7805ACD2T-TR, Price=None
U5: library part CMP-002-000179-2, Component Type=Standard, Design Item ID="LORA RFM95W", Pin Count=16, Source="LORA RFM95W.SchLib"

## Via types
v1: diameter 19.68, hole 11.81, Top Layer to Bottom Layer, 101 vias

## Nets (pads, with @x,y where several pads share a name; then routed paths per layer and width w, separated by ;. In a path a pad name is that pad's centre, name@x,y a point inside that pad or via, vN(x,y) a via of type N, cw(c..) or ccw(c..) an arc to the next point about the centre after c; other vN are vias at no path point)
3V3: C1.1 C2.1 C3.1 C4.1 C7.1 C8.1 C11.1 C12.2 C14.2 C15.2 C16.1 IC1.6 IC1.7 IC1.8 IMU1.3 IMU1.7 IMU1.11 MAG1.2 MAG1.4 MAG1.13 R2.1 R4.1 R5.1 R6.2 R9.1 R10.2 R11.1 R12.2 R16.1 R17.2 R18.2 R20.2 U1.9 U1.24 U1.36 U1.48 U2.1 U3.2 U3.4 U5.13 | length 11406.9
  Top Layer w10: MAG1.4 1062.22,3771.22 1100.5,3809.5 ; MAG1.2 1101.59,3808.41 1100.5,3809.5 ; U5.13@1115.07,3059.52 1115.59,3059 v1(1216,3059) 1239.04,3082.04 C15.2 1239.04,3473.63 1212.96,3499.71 1212.96,3509.04 v1(1159,3563) 1159,3565.62 1172,3578.62 1172,3586.53 ; MAG1.13 1144.9,3672.17 1145.81,3671.26 1145.81,3668.31 1172,3642.12 1172,3586.53 ; R10.2 R6.2 1300.09,3699.91 1318.18,3681.82 1318.6,3681.82 1346,3654.41 1346,3616.86 1340.14,3611 ; R11.1 1308.72,3575.1 1340.14,3606.52 1340.14,3611 ; v1@1400.93,3719.07 1538.19,3719.07 1554.43,3735.32 IMU1.11 ; R12.2 1529.91,3603.18 1519.95,3613.14 1445.46,3613.14 1406,3652.6 1406,3694.46 1400.47,3699.98 1400.47,3719.53 1380,3740 1380,3754.34 1379.35,3754.99 1379.35,3774.48 1423.18,3818.32 1429.57,3818.32 1439.53,3828.28 R9.1 1435.41,3843.02 1163.09,3843.02 1142.08,3822.01 1113.01,3822.01 1100.5,3809.5 ; IMU1.7 1720.94,3695.94 1750,3725 1750,3743.49 1776.03,3769.53 R4.1 1781.58,3774.61 v1(1728.76,3774.61) 1675.94,3774.61 IMU1.3 ; R5.1 1730.47,3585.66 1740.43,3575.7 1747.01,3575.7 1787.84,3534.87 R17.2 2016.94,3527.93 2049.77,3527.93 v1(2051.62,3526.08) ; R16.1 1919.63,3229.43 1994.06,3303.87 2056.57,3303.87 2074.57,3285.87 C3.1@2086.87,3285.87 ; v1(2000,2910) 2034.44,2875.55 C2.1 2041.39,2881.5 2055.48,2881.5 2074.35,2862.63 2074.35,2854.34 2044.15,2824.14 2044.15,2810.27 2069.83,2784.6 2106.61,2747.82 2180.58,2673.84 2379.3,2673.84 2427.46,2722 2781.84,2722 2781.92,2721.92 2830,2770 U2.1 ; R18.2 v1(2010,3780) ; C3.1 2122.26,3245.85 2154.9,3245.85 2155.73,3245.01 U1.24 2156.08,3215.07 2156.08,3170.94 2156.92,3170.1 2156.92,3160 v1@2258.15,3058.77 ; U1.36 2102.93,2946.08 2147.06,2946.08 2147.9,2946.92 2156.92,2946.92 v1(2260,3050) ; v1(2420,3825) 2421.61,3826.61 IC1.7 ; 2434.01,2881.05 2373.1,2881.05 2372.27,2881.89 U1.48 2371.92,2892.93 2371.92,2938.08 v1(2260,3050) ; 2436.5,2878.57 2436.5,2873.5 ; C1.1 2435.93,2831.96 2435.93,2846.05 2436.5,2846.62 2436.5,2873.5 ; v1(2445,3200) 2446.85,3201.85 2461.45,3201.85 2493.04,3233.45 C4.1 ; IC1.6 IC1.7 ; v1(2517.38,3117.62) 2514.76,3117.62 2500.35,3103.21 U1.9 2313.21,3103.21 v1(2260,3050) ; R2.1@2532.11,2960 2513.1,2940.99 2503.99,2940.99 2436.5,2873.5 ; R20.2 2617.61,3839.53 2587.21,3869.92 IC1.8 IC1.7 ; 1172,3586.53 1196.47,3611 1340.14,3611
  Bottom Layer w10: C12.2 1129.04,3626 1129.04,3583.66 1136.11,3576.59 1142.79,3576.59 1156.38,3563 v1(1159,3563) 1194.57,3527.43 1207.43,3527.43 v1(1400,3720) 1375.16,3744.84 1375.16,3770.29 1389.71,3784.84 1473.71,3784.84 1479.54,3779.02 C14.2 ; v1(1216,3059) 1216,2972.19 1214,2970.19 1214,2886 1410.48,2689.52 1410.48,2592.7 1374.23,2556.45 1374.23,2491.33 1410.48,2455.07 1410.48,2368.16 1355.48,2313.16 1355.48,2226.25 1293.96,2164.73 C8.1 ; U3.2 1685.75,2200 1700.43,2214.69 1700.43,2247.48 1736.45,2283.5 1736.45,2646.45 v1(2000,2910) 2140,3050 v1(2260,3050) 2260,3275.13 2420,3435.13 2420,3505 ; C11.1 1728.75,3774.59 v1@2001.99,3774.61 ; v1(2010,3780) 2065,3725 2065,3525 2400,3525 2420,3505 ; v1(2051.62,3526.08) 2065,3526.08 ; v1(2445,3200) 2445,3197.38 v1@2515.53,3126.85 ; C16.1 2499.37,3789.57 2463.94,3825 v1(2420,3825) 2420,3505
  Bottom Layer w20: C8.1@1290.52,2142.18 1290.52,2075.48 C7.1 ; C8.1@1293.96,2142.18 C8.1 1381.78,2161.78 U3.4 U3.2
5V: C9.1 P1.2 P1.5 U4.2 | length 1477.7
  Bottom Layer w10: C9.1 C9.1@2363.94,2240.7
  Bottom Layer w20: C9.1@2363.94,2240.7 2462.67,2141.97 U4.2 2601.97,2141.97 2700,2240 2840,2240 2875,2275 2875,2875 2810.05,2939.95 2795.91,2939.95 2755.86,2980 P1.5
AC_INT: R7.1 U1.18 | length 1175.3
  Top Layer w10: R7.1 v1(1680,3920) ; v1(2255,3360) 2273.84,3341.16 U1.18
  Bottom Layer w10: v1(1680,3920) 1622.72,3862.72 1622.72,3757.72 2002.76,3377.68 2213.49,3377.68 2219.34,3371.84 2226.41,3371.84 2236.39,3361.85 2253.15,3361.85 v1(2255,3360)
CSS: R16.2 U1.25 U5.5 | length 362.5
  Top Layer w10: U5.5 1770,3158.26 1848.83,3158.26 1849.54,3158.96 1964.67,3158.96 1967.98,3162.27 U1.25
DIO0: U1.30 U5.14 | length 1250
  Top Layer w10: U5.14@1115.07,2980.78 1195.03,2980.78 1236.32,2939.49 1236.32,2928.71 1304.18,2860.84 1588.29,2860.84 1663.83,2785.3 1820.35,2785.3 1827.96,2792.91 1827.96,2846.2 1845.96,2864.2 1845.96,2912.96 1996.5,3063.5 2102.24,3063.5 U1.30
GND: *1.1 *1.3 *1.4 C1.2 C2.2 C3.2 C4.2 C5.2 C6.2 C7.2 C8.2 C9.2 C10.2 C11.2 C12.1 C13.2 C14.1 C15.1 C16.2 C17.2 H1.1 H2.1 H3.1 H4.1 IC1.1 IC1.10 IC1.12 IMU1.4 IMU1.6 J1.2 J1.3 J1.4 J1.5 J2.2 J2.3 J2.4 J2.5 MAG1.9 MAG1.11 P1.3 P1.6 R1.1 R3.1 R14.2 R15.2 U1.8 U1.23 U1.35 U1.47 U2.4 U3.1 U4.3 U5.1 U5.8 U5.10 | length 608.6
  Top Layer w10: R15.2 1440.15,3664.57 1468.11,3636.61 1553.99,3636.61 1560.38,3643 v1(1563,3643) ; IMU1.6 1675.94,3715.71 1695.71,3715.71 v1(1720,3740) ; IMU1.4 1675.94,3754.92 1702.46,3754.92 1717.86,3739.52 v1@1717.86,3737.86 ; C2.2 2084.28,2815.72 v1(2110,2790) ; U1.35 2102.93,2965.76 2145.41,2965.76 2178.15,2998.5 2178.15,3008.15 v1(2180,3010) ; U1.23 2175.76,3215.07 2175.76,3172.59 2193.35,3155 ; 2373.77,3083.53 U1.8 2513.53,3083.53 2515,3085
  other v1: 2141,2056 1420,2060 2650,2120 1772,2205 1227,2206 2938,2229 1930,2240 2451,2252 1080,2270 1260,2270 1534,2289 1650,2370 1490,2380 1830,2450 1480,2560 1650,2560 2353,2596 1830,2610 2090,2630 1950,2700 1653.9,2727.99 1480,2730 2380,2815 2205,2824 2565,2835 1550,2900 1300,2950 2005,2966 2260,2975 2335,3040 2174.16,3090.34 1550,3100 1850,3110 2225,3145 1300,3150 2634.16,3170.34 2105,3200.59 2880,3207 1550,3300 1856,3320 1300,3350 2306,3373 2459.16,3375.34 1910,3410 1740,3440 1060,3480 1840,3480 1450,3500 1600,3500 1060,3590 2250,3590 1888,3597 2380,3670 1260,3686 2570,3700 1800,3710 1920,3710 2740,3730 2900,3730 1171,3756 2313,3790 2590,3790 1870,3850 2040,3850 2740,3900 2211,3911 1230,3920 1340,3920 2134,3968 1540,3970 1740,3970 1930,3970 2390,3970 2600,3970
GPS_INT: R19.1 U1.11 | length 644.4
  Top Layer w10: U1.11 2481.76,3142.58 2591.44,3252.27 2591.44,3591.9 2609.52,3609.98 2628.24,3628.69 R19.1
GPS_RST: IC1.9 R20.1 U1.10 | length 1066.1
  Top Layer w10: U1.10 2487.53,3122.9 2609.44,3244.81 2609.44,3584.44 2666.83,3641.83 2666.83,3878.3 2635.13,3910 R20.1 2626.62,3911.61 2508.62,3911.61 IC1.9
GPS_RX: IC1.3 U1.12 | length 625
  Top Layer w10: U1.12 2475.99,3162.27 2573.44,3259.72 2573.44,3613.21 2544.01,3642.64 2517.76,3642.64 IC1.3
GPS_TX: IC1.2 U1.13 | length 537.7
  Top Layer w10: U1.13 2420.86,3215.42 2555.44,3350 2555.44,3593.47 2549.58,3599.33 2517.76,3599.33 IC1.2
GYR_INT: R13.1 U1.19 | length 1178.8
  Top Layer w10: v1(1404.19,3760) R13.1 ; v1(2221.95,3334.09) 2254.16,3301.89 U1.19
  Bottom Layer w10: v1(1404.19,3760) 1515.13,3760 1725,3550.13 1725,3520.66 1885.97,3359.68 2196.36,3359.68 v1(2221.95,3334.09)
LED: D1.2 U1.38 | length 1482
  Top Layer w10: U1.38 2175.42,2762.08 2209.65,2727.84 2352.38,2727.84 2404.54,2780 2750.27,2780 2814.53,2844.26 2837.04,2866.77 2837.04,2940.68 2911.36,3015 2948.64,3015 2975,2988.64 2975,2687.68 D1.2
Left_PWM: P1.1 U1.16 | length 796.9
  Top Layer w10: U1.16 2313.56,3215.76 2313.56,3258.25 2383.46,3328.15 2388.15,3328.15 v1(2390,3330)
  Bottom Layer w10: v1(2390,3330) 2390,3160 2614.53,2935.47 2694.53,2935.47 2707.22,2922.78 2708.99,2922.78 P1.1
LiPo+: *1.2 C5.1 C6.1 C10.1 F1.1 F2.1 | length 968.2
  Bottom Layer w10: C5.1 C5.1@1840,2123.49 ; C6.1 C6.1@1840,2293.94 ; F1.1 F1.1@2097.5,2362.5 ; F2.1 2222.54,2362.5 F2.1@2240.04,2380 ; *1.2@2240.04,2505.04 *1.2
  Bottom Layer w25: C5.1@1840,2123.49 C6.1 ; C6.1@1840,2293.94 1908.56,2362.5 F1.1 ; F1.1@2097.5,2362.5 2240.04,2505.04 F2.1@2240.04,2380 ; *1.2 2299.85,2453.46 C10.1
LoRa_Reset: U1.29 U5.6 | length 983.2
  Top Layer w10: U5.6@1744.99,3217 1705.03,3217 1669.3,3181.27 1662.48,3181.27 1642.96,3161.75 1642.96,2895.72 1674.64,2864.04 1820.35,2864.04 1827.96,2871.65 1827.96,2920.42 1991.07,3083.53 U1.29
Mag_int: R8.2 U1.20 | length 1267.9
  Top Layer w10: R8.2 1229.72,3575.5 1278,3527.22 v1(1278,3527) ; v1(2140.29,3334.84) 2142.14,3336.7 2164.76,3336.7 2165.63,3337.57 2183.35,3337.57 2234.47,3286.44 U1.20
  Bottom Layer w10: v1(1278,3527) 1436.41,3368.59 1628.56,3368.59 1727.16,3270 1873.69,3270 1945.37,3341.68 2071.95,3341.68 2078.79,3334.84 v1(2140.29,3334.84)
MISO: U1.27 U5.2 | length 646.7
  Top Layer w10: U5.2@1744.99,2902.04 1705.03,2902.04 1667.03,2940.04 1667.03,3011.16 1677.38,3021.52 1878.14,3021.52 1979.52,3122.9 U1.27
MOSI: U1.28 U5.3 | length 408.3
  Top Layer w10: U5.3@1744.99,2980.78 1862.86,2980.78 1985.29,3103.21 U1.28
NetC13_1: C13.1 MAG1.10 | length 130
  Top Layer w10: MAG1.10 1081.91,3691.29 1091,3700.38 v1(1091,3703)
  Bottom Layer w10: v1(1091,3703) 1092.85,3704.85 1092.85,3718.75 1126.47,3752.37 C13.1
NetC17_1: C17.1 L1.1 R21.2 | length 258.8
  Top Layer w10: C17.1 2038.95,3444.75 2066.91,3416.79 2116.32,3416.79 2138.06,3438.53 2158.68,3438.53 R21.2@2168.64,3448.49 ; R21.2 R21.2@2168.64,3448.49 ; L1.1 2178.6,3437.67 2168.64,3447.63 R21.2@2168.64,3448.49
NetD1_1: D1.1 R3.2 | length 107.5
  Top Layer w10: R3.2 D1.1
NetF1_2: F1.2 U3.3 | length 645.9
  Bottom Layer w10: U3.3 U3.3@1685.75,2109.45 ; F1.2@2045,2240 2062.5,2257.5 F1.2
  Bottom Layer w25: U3.3@1685.75,2109.45 1755.2,2040 1960,2040 2080,2160 F1.2
NetF2_2: F2.2 U4.1 | length 727
  Bottom Layer w10: F2.2 F2.2@2230,2247.5
  Bottom Layer w25: F2.2@2230,2247.5 2230,2120 2310,2040 2638.03,2040 U4.1
NetIC1_5: IC1.5 R19.2 | length 121.4
  Top Layer w10: IC1.5 2507.48,3740.47 R19.2
NetIC1_11: IC1.11 J2.1 R22.2 | length 901.5
  Top Layer w10: IC1.11 2143.74,3859.17 2170,3859.17 2181.43,3847.75 2189.89,3839.28 2189.89,3832.71 2190,3832.6 2190,3770 2472.52,3487.48 2472.52,3462.86 R22.2 v1(2530.6,3455.38)
  Bottom Layer w10: v1(2530.6,3455.38) 2751.9,3455.38 2754.55,3452.73 2783.83,3452.73 J2.1
NetIMU1_10: IMU1.10 R15.1 | length 98.3
  Top Layer w10: R15.1 1540.58,3675.2 1553.86,3688.48 1553.86,3702.27 1567.15,3715.55 IMU1.10 IMU1.10
NetIMU1_12: IMU1.12 R9.2 R13.2 | length 155.1
  Top Layer w10: R9.2 R13.2 1513.24,3756.76 1547.06,3756.76 1548.82,3755 IMU1.12
NetIMU1_15: IMU1.15 R14.1 | length 135.1
  Top Layer w10: R14.1 1510,3907.19 1551.51,3865.68 1552.59,3865.68 1584.13,3834.13 IMU1.15
NetIMU1_16: IMU1.16 R4.2 R7.2 | length 274.6
  Top Layer w10: R7.2 1579.58,3910.04 1579.58,3889.03 1630,3838.6 IMU1.16@1630,3831.9 ; IMU1.16 IMU1.16@1630,3831.9 ; R4.2 1778.64,3831.98 1630.08,3831.98 IMU1.16@1630,3831.9
NetJ1_1: J1.1 U5.9 | length 1068.5
  Top Layer w10: U5.9@1115.07,3374.48 1095.82,3355.23 1049.04,3355.23 1049.04,3350.04 1030,3331 1030,3033.93 1027.52,3031.45 1027.52,2571.93 1099.45,2500 J1.1
NetL1_2: L1.2 R22.1 | length 93.3
  Top Layer w10: L1.2 2399.57,3437.67 2409.53,3447.63 R22.1
NetMAG1_15: MAG1.15 R8.1 R11.2 | length 195.8
  Top Layer w10: MAG1.15 1142.73,3710.76 1156.19,3710.76 1167.35,3699.6 1167.35,3678.13 1175.97,3669.5 1184.94,3669.5 1208.46,3645.97 R8.1 ; R8.1@1219.29,3645.97 1219.49,3645.77 1297.9,3645.77 R11.2
NetR1_2: R1.2 U1.44 | length 144.9
  Top Layer w10: R1.2 2256.7,2788.4 2256.7,2806.7 2293.53,2843.53 U1.44
NetR2_2: R2.2 U1.7 | length 126.6
  Top Layer w10: U1.7 2537.08,3063.84 R2.2@2547.63,3053.29
Right_PWM: P1.4 U1.17 | length 725.9
  Top Layer w10: U1.17 2293.53,3273.53 2312.89,3292.89 2313.63,3292.89 2333,3312.26 2333,3313 v1(2350,3330)
  Bottom Layer w10: v1(2350,3330) 2350,3160.47 2625.47,2885 2646.78,2885 P1.4
SCK: U1.26 U5.4 | length 392
  Top Layer w10: U5.4@1744.99,3059.52 1745.74,3060.27 1891.44,3060.27 1973.75,3142.58 U1.26
SCL: IC1.17 IMU1.8 MAG1.1 R5.2 R6.1 R17.1 U1.21 | length 2156.1
  Top Layer w10: MAG1.1 1121.28,3775.75 1170.55,3825.02 1261.5,3825.02 1289.46,3797.06 1340.68,3797.06 1357.16,3780.59 1357.16,3751.72 1362,3746.88 1362,3713 1388,3687 1388,3645.14 1449,3584.14 1465.15,3584.14 v1(1467,3582.29) ; IMU1.8 1630,3671.4 1630.08,3671.32 1630.27,3671.32 1660,3641.59 ; v1(1700.16,3537) 1699.17,3537.99 1686.01,3537.99 1662.44,3561.56 1662.44,3583.22 1660,3585.66 1660,3641.59 ; v1@1702.78,3537 1702.78,3534.38 1732.16,3505 1755.11,3505 1918.43,3341.68 2091.43,3341.68 2133.26,3299.84 2178.62,3299.84 2214.01,3264.45 2214.01,3252.91 2214.44,3252.48 2214.44,3215.76 U1.21 ; IC1.17 2124.58,3601.66 2013.68,3601.66 R17.1 2004.18,3599.52 1975.27,3599.52 1933.2,3641.59 1660,3641.59
  Bottom Layer w10: v1(1467,3582.29) 1654.87,3582.29 v1(1700.16,3537)
SDA: IC1.16 IMU1.9 MAG1.16 R10.1 R12.1 R18.1 U1.22 | length 2145.5
  Top Layer w10: MAG1.16 1141.95,3763.12 1175.89,3797.06 1255.64,3797.06 1261.5,3791.2 1261.5,3778.91 1278.82,3761.59 1321.84,3761.59 1344,3739.42 1344,3704 1370,3678 1370,3637.69 1450.24,3557.45 1572.17,3557.45 1599.71,3584.99 R12.1@1599.71,3586.33 ; IMU1.9 1592.34,3695.94 1592.42,3695.87 1592.42,3687.66 1600.38,3679.7 1600.38,3606.12 R12.1 1600.38,3586.33 1605.83,3580.88 1605.83,3562.17 1681,3487 1747,3487 1910.32,3323.68 2083.97,3323.68 2125.81,3281.84 2171.16,3281.84 2194.76,3258.25 2194.76,3215.76 U1.22 ; IMU1.9@1592.42,3696.02 1609.82,3696.02 1619.69,3705.89 1640.31,3705.89 1649.58,3696.62 1649.58,3685.64 1667.22,3668 2006.57,3668 R18.1 2021.18,3653.39 IC1.16
SWCLK: U1.37 U2.3 | length 1063.3
  Top Layer w10: U1.37 2156.08,2892.24 2156.08,2755.96 2202.2,2709.84 2359.84,2709.84 2410,2760 2764,2760 2860,2856 2860,2880 2920.43,2940.43 2920.43,2960.43 U2.3
SWDIO: U1.34 U2.2 | length 1210.4
  Top Layer w10: U1.34 2102.24,2984.76 2059.75,2984.76 2048.24,2973.25 2048.24,2931.69 2135,2844.93 2135,2751.58 2194.74,2691.84 2371.84,2691.84 2420,2740 2770,2740 2893.18,2863.18 2923.18,2863.18 U2.2
VCC_ANT: IC1.14 R21.1 | length 355.5
  Top Layer w10: R21.1 2098.17,3466.01 2143.95,3511.79 2145.61,3511.79 2181.43,3547.61 2181.43,3717.83 2170,3729.25 2143.74,3729.25 IC1.14
pads on no net: IC1.4 IC1.13 IC1.15 IC1.18 IMU1.1 IMU1.2 IMU1.5 IMU1.13 IMU1.14 MAG1.3 MAG1.5 MAG1.6 MAG1.7 MAG1.8 MAG1.12 MAG1.14 U1.1 U1.2 U1.3 U1.4 U1.5 U1.6 U1.14 U1.15 U1.31 U1.32 U1.33 U1.39 U1.40 U1.41 U1.42 U1.43 U1.45 U1.46 U5.7 U5.11 U5.12 U5.15 U5.16

## Polygon pours and split planes (outlines as drawn)
GND on Bottom Layer "GND_L02_P007" (solid, pour order 7): 1094.62,3995.05 1085.62,3994.05 1080.62,3993.05 1075.62,3992.05 1072.62,3991.05 1069.62,3990.05 1063.62,3988.05 1059.62,3986.05 1055.62,3984.05 1053.62,3983.05 1051.62,3982.05 1049.62,3981.05 1042.62,3976.05 1038.62,3973.05 1034.62,3969.05 1031.62,3966.05 1029.62,3964.05 1027.62,3962.05 1024.62,3958.05 1021.62,3954.05 1017.62,3948.05 1013.62,3940.05 1011.62,3936.05 1010.62,3933.05 1008.62,3928.05 1007.62,3924.05 1006.62,3919.05 1005.62,3914.05 1004.62,3907.19 1004.62,3906.05 1004,2099 1005.62,2086.05 1005.62,2085.05 1006.62,2080.05 1007.62,2076.05 1008.62,2073.05 1009.62,2070.05 1010.62,2067.05 1012.62,2062.05 1013.62,2060.05 1015.62,2056.05 1016.62,2054.05 1017.62,2052.05 1019.62,2049.05 1021.62,2046.05 1024.62,2042.05 1026.62,2039.05 1031.62,2034.05 1033.62,2032.05 1037.62,2028.05 1042.62,2024.05 1045.62,2022.05 1048.62,2020.05 1053.62,2017.05 1055.62,2016.05 1059.62,2014.05 1063.62,2012.05 1066.62,2011.05 1069.62,2010.05 1072.62,2009.05 1076.62,2008.05 1080.62,2007.05 1086.62,2006.05 1097.62,2005.05 2903.62,2005.05 2913.62,2006.05 2918.62,2007.05 2923.62,2008.05 2931.17,2010.28 2935.62,2012.05 2939.62,2014.05 2943.62,2016.05 2947.62,2018.05 2950.62,2020.05 2953.62,2022.05 2956.62,2024.05 2961.62,2028.05 2962.62,2029.05 2969.62,2036.05 2975.62,2043.05 2981.62,2052.05 2987.62,2064.05 2989.62,2070.05 2990.62,2073.05 2991.62,2077.05 2992.62,2081.05 2993.62,2086.05 2994.62,2093.05 2994.62,3906.05 2992.62,3919.05 2991.62,3924.05 2990.62,3927.05 2989.62,3930.05 2988.62,3933.05 2986.62,3938.05 2985.62,3940.05 2981.62,3948.05 2977.62,3954.05 2970.62,3963.05 2974.51,3958.05 2970.62,3963.05 2969.62,3964.05 2965.62,3968.05 2963.62,3970.05 2957.62,3975.05 2950.62,3980.05 2945.62,3983.05 2943.62,3984.05 2941.62,3985.05 2937.62,3987.05 2935.62,3988.05 2932.62,3989.05 2923.62,3992.05 2913.62,3994.05 2912.62,3994.05 2902.62,3995.05
GND on Top Layer "GND_L01_P006" (solid, pour order 6): 1005,2095 1006,2085 1007,2080 1008,2076 1009,2073 1010,2070 1011.91,2064.91 1014,2061 1016,2056 1020,2049 1022,2046 1025,2042 1027,2039 1028,2038 1033,2033 1040,2027 1047,2022 1054,2018 1064.59,2012.22 1082,2007 1098,2005 2904,2005 2914,2006 2911,2006 2914,2006 2919,2007 2924,2008 2931,2010 2936,2012 2944,2016 2951,2020 2954,2022 2962,2028 2964,2030 2972,2038 2976,2043 2983,2054 2986,2060 2989,2067 2990,2070 2992,2076 2993,2081 2994,2086 2995,2095 2995,3906 2994,3913 2993,3920 2992,3924 2989,3933 2988,3936 2987,3938 2985,3942 2980,3951 2978,3954 2975,3958 2972,3962 2966,3968 2963,3971 2953,3979 2942,3985 2936,3988 2924,3992 2913,3994 2903,3995 1095,3995 1086,3994 1081,3993 1077,3992 1073,3991 1067,3989 1060,3986 1054,3983 1047,3979 1042,3975 1032,3966 1026,3959 1022,3954 1019,3949 1016,3944 1013,3938 1011,3933 1009,3928 1008,3923 1006,3914 1005,3906 1005,3902

## Silkscreen, mask and mechanical layers (free items; w line width, h text height)
Top Overlay:
  drawing of 89 lines, arcs and shapes, not listed
  text "SWCLK" at 2865,2935 h40 r90
  text ">PWM<" at 2615,2780 h40
  text "SWDIO" at 2865,2720 h40 r90
Bottom Overlay:
  region: 3977 vertices and 0 holes, not listed, extent 2153.69,3704.55 2306.94,3893.51
  text "Recovery Control System" at 2450,3603.33 h40
  text "Designed By" at 2220,3533.33 h40
  text "Paweł Sucharzewski" at 2355,3460 h40
  text "08.2023" at 2139,3394 h40